# Altium PCB KEY_LED_Panel_v1.PcbDoc
Units mm, origin at the board's own origin, x right, y up, seen from the top; angles counter-clockwise.
Board outline 16 x 47 mm, 2 copper layers (L1 [TOP], L2 [BOT]), stack 1.57 mm thick; 15 components, 9 nets, 32 pads, 45 vias.
Unrouted connection lines stored in the file: 133.
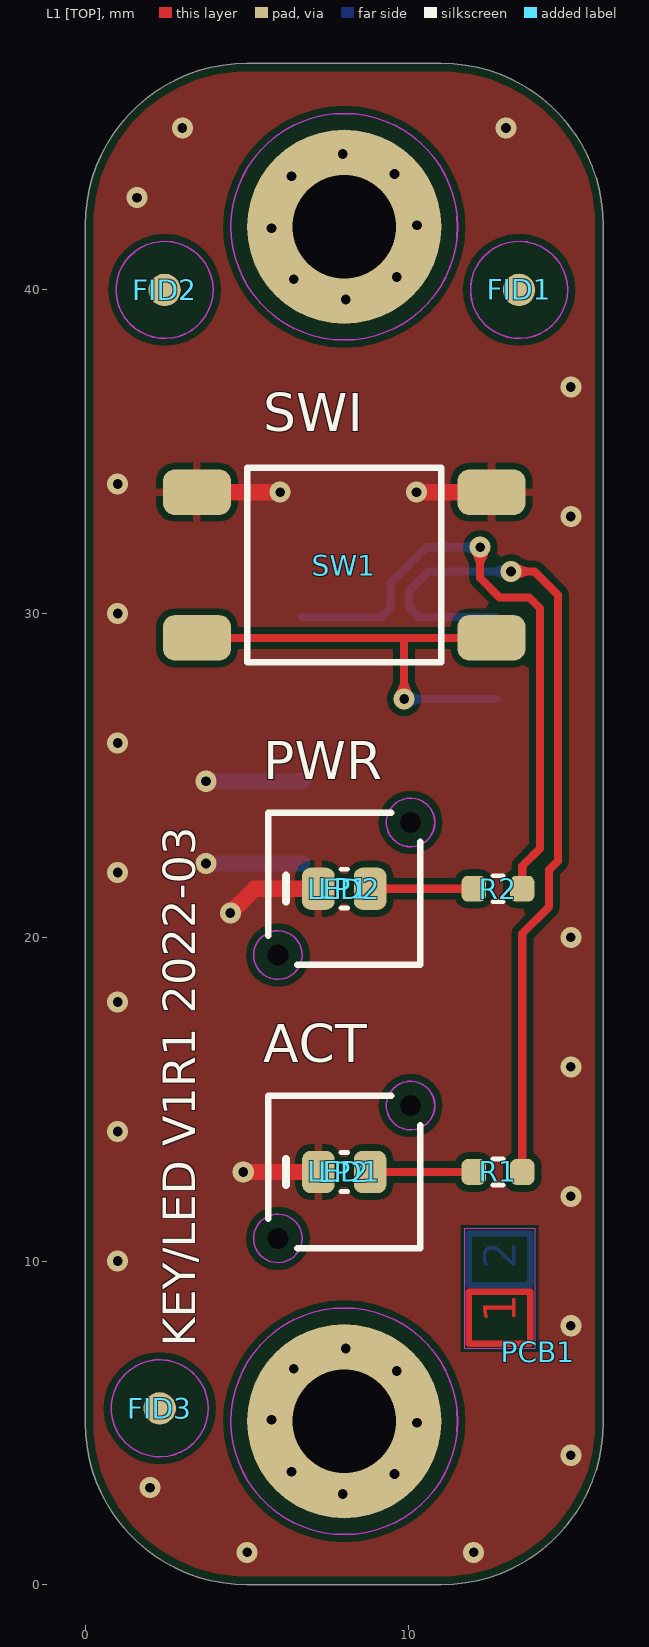
[diagram p0: L1 [TOP] view]
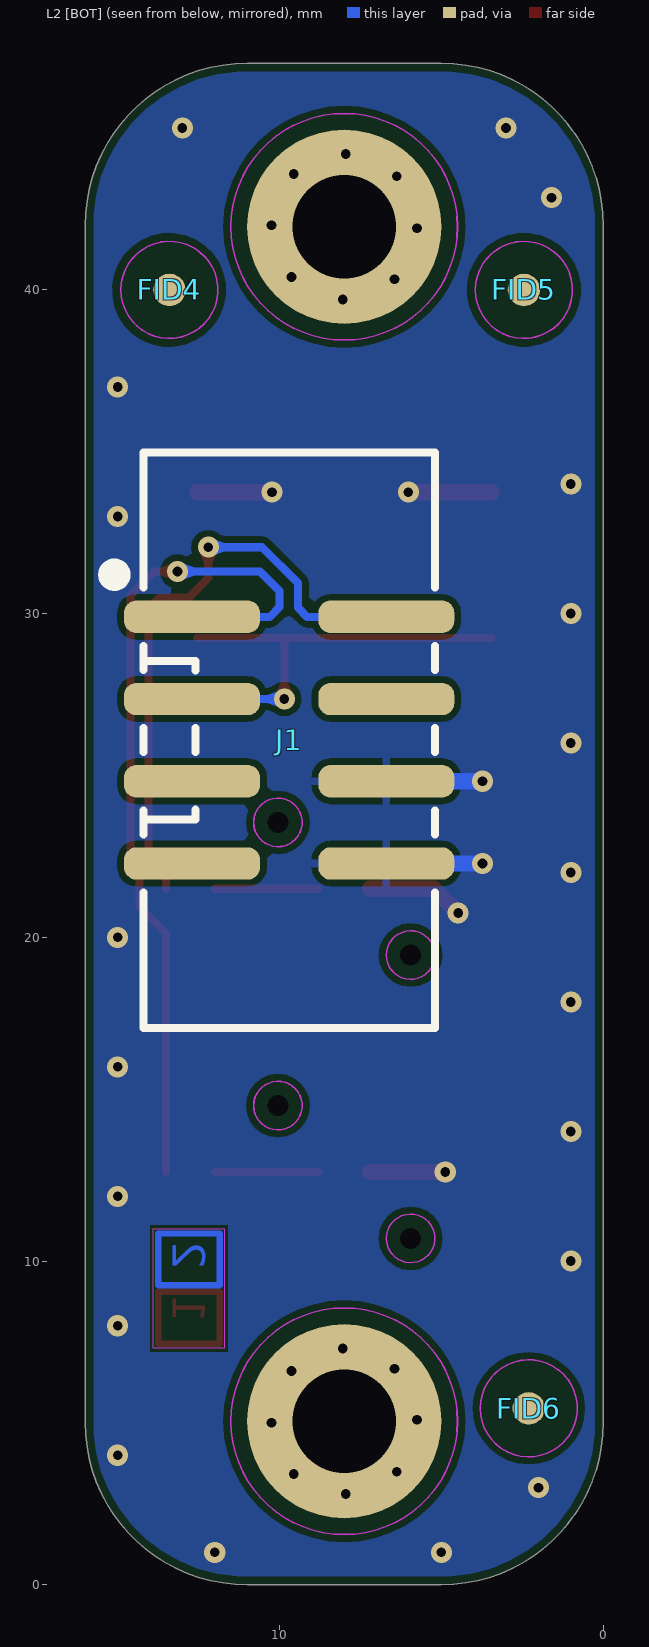
[diagram p1: L2 [BOT] view, seen from below]
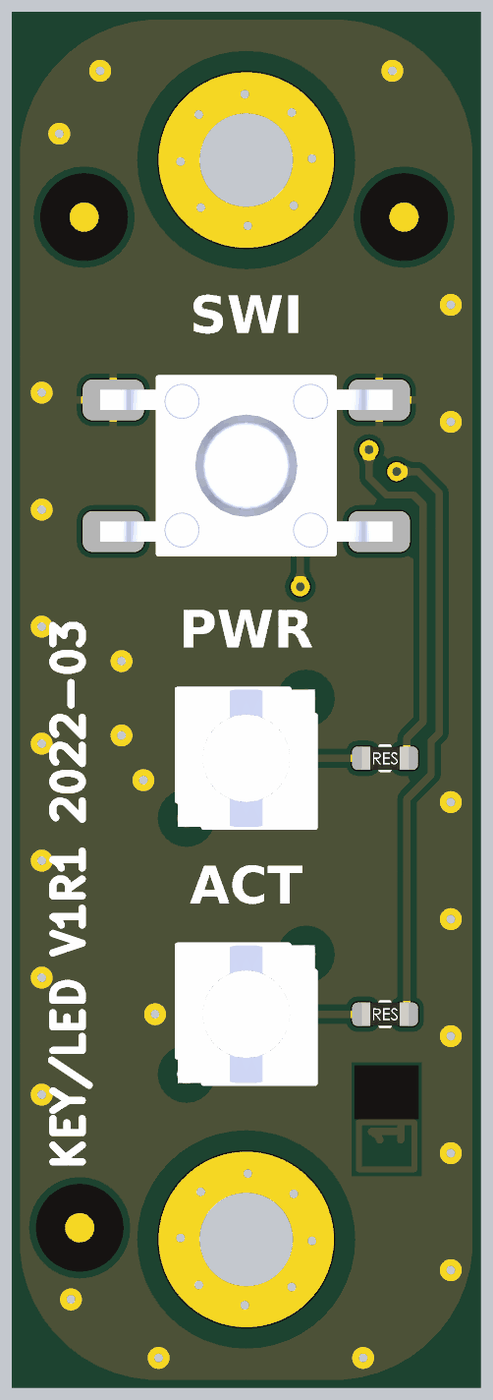
[diagram p2: 3D render of the assembled board from above, using the file's embedded part models]

## Layer stack, top to bottom
Solder [TOP]: solder mask 0.015, Solder Resist, Dk 3.5
L1 [TOP]: signal copper 0.035
prepreg #1: prepreg 0.1, PP-006, Dk 4.05
Core: dielectric 1.3, FR-4, Dk 4.05
prepreg #2: prepreg 0.1, PP-006, Dk 4.05
L2 [BOT]: signal copper 0.035
Solder [BOT]: solder mask 0.015, Solder Resist, Dk 3.5

## Board outline
0,5 ccw(c5,5) 5,0 11,0 ccw(c11,5) 16,5 16,42 ccw(c11,42) 11,47 5,47 ccw(c5,42) 0,42

## Design rules (kind name [scope] priority, off if disabled: settings)
BoardOutlineClearance BoardOutlineClearance_indicator [InComponent('PCB1')] p1: gap=0 ignorepadtopadclearanceinfootprint=FALSE
BoardOutlineClearance BoardOutlineClearance_Silk [IsText] p2: gap=0 ignorepadtopadclearanceinfootprint=FALSE
BoardOutlineClearance [All] p3: gap=0.25 ignorepadtopadclearanceinfootprint=FALSE
Clearance Clearance_marking [InComponent('PCB1')] p1: gap=0 ignorepadtopadclearanceinfootprint=FALSE
Clearance Clearance_polygon [InPolygon] p2: gap=0.2 ignorepadtopadclearanceinfootprint=FALSE
Clearance [All] p3: gap=0.2 ignorepadtopadclearanceinfootprint=FALSE
HoleSize [All] p1: absolutevalues=TRUE maxlimit=5 minlimit=0.2 maxpercent=80.000 minpercent=20.000
HoleToHoleClearance [All] p1: gap=0.4 allowstackedmicrovias=TRUE
MinimumAnnularRing [All] p1: minimumring=0.1
MinimumSolderMaskSliver [All] p1: minsoldermaskwidth=0.05
PlaneClearance [All] p1: clearance=0.5
PlaneConnect [All] p1: planeconnectstyle=Relief reliefexpansion=0.5 reliefentries=4 reliefconductorwidth=0.5 reliefairgap=0.3
PolygonConnect PolygonConnect_via [IsVia] p1: connectstyle=Direct reliefconductorwidth=0.254 reliefentries=4 polygonreliefangle="90 Angle" airgapwidth=0.254
PolygonConnect [All] p2: thpad.connectstyle=Relief thpad.reliefconductorwidth=0.5 thpad.reliefentries=4 thpad.polygonreliefangle="90 Angle" thpad.airgapwidth=0.3 smdpad.connectstyle=Relief smdpad.reliefconductorwidth=0.25 smdpad.reliefentries=4 smdpad.polygonreliefangle="90 Angle" smdpad.airgapwidth=0.2 via.connectstyle=Direct via.reliefconductorwidth=0.2 via.reliefentries=4 via.polygonreliefangle="90 Angle" via.airgapwidth=0.3
RoutingVias [All] p1: holewidth=0.3 width=0.65 viastyle="Through Hole" minholewidth=0.2 minwidth=0.45 maxholewidth=0.4 maxwidth=0.8
SilkToSilkClearance [All] p1: silktosilkclearance=0.15
SilkToSolderMaskClearance [IsPad] p1: minsilkscreentomaskgap=0.1 clearancetoexposedcopper=TRUE
SolderMaskExpansion SolderMaskExpansion_via [IsVia] p1: expansion=-10 istentingtop=FALSE
SolderMaskExpansion [All] p2: expansion=0.05 istentingtop=FALSE
Width [All] p1: maxlimit=4 minlimit=0.1 preferedwidth=0.2
23 further rules are at their usual default settings.

## Components (designator, comment, footprint, x,y, rotation, side; value= is the part's Value field where it differs from the comment)
FID1 "Fiducial" PCB_FID_RND_100x300 13.4,40 r0 top
FID2 "Fiducial" PCB_FID_RND_100x300 2.45,40 r0 top
FID3 "Fiducial" PCB_FID_RND_100x300 2.3,5.45 r0 top
FID4 "Fiducial" PCB_FID_RND_100x300 13.4,40 r90 bottom
FID5 "Fiducial" PCB_FID_RND_100x300 2.45,40 r90 bottom
FID6 "Fiducial" PCB_FID_RND_100x300 2.3,5.45 r90 bottom
J1 "8pin (2x4pin)" CON_IDC_SMD_P254_2X04 9.7,26.05 r270 bottom locked
LED1 "Green" LED_0805_GRN_R 8,12.75 r0 top
LED2 "Red" LED_0805_RED_R 8,21.5 r0 top
LP1 "VLP-400-F" LED_BVR_VLP-400-F 8,21.5 r0 top locked
LP2 "VLP-400-F" LED_BVR_VLP-400-F 8,12.75 r0 top locked
PCB1 "PCB_LAYER_STACKUP" PCB_STACKUP-2L_A1 14,7.2 r90 top
R1 "15k" RES_0603_R 12.75,12.75 r0 top
R2 "2k" RES_0603_R 12.75,21.5 r0 top
SW1 "TACT Switch" SWI_SHR_1301.9319 8,31.5 r180 top locked

## Footprints (in the part's own frame and the unit in brackets; to place one, negate y for a bottom-side part, rotate by r counter-clockwise, add the part's x,y. Pads: shape width x height; smd on the part's side, far side on the other; paste and mask are expansions set on the pad)
CON_IDC_SMD_P254_2X04 [mm]
  rrect75% 1x4.2 smd: 1(-3.85,-3) 2(-3.85,3) 3(-1.31,-3) 4(-1.31,3) 5(1.23,-3) 6(1.23,3) 7(3.77,-3) 8(3.77,3)
  silkscreen extent -8.93,-5.65 8.85,4.51, body extent -8.89,-4.75 8.89,4.75, height 10.2
LED_0805_GRN_R [mm]
  rrect50% 1x1.3 smd: 1(-0.8,0) 2(0.8,0)
  silkscreen extent -1.8,-0.6 0.1,0.6, body extent -1.01,-0.63 1.01,0.62, height 1.1
LED_0805_RED_R [mm]
  rrect50% 1x1.3 smd: 1(-0.8,0) 2(0.8,0)
  silkscreen extent -1.8,-0.6 0.1,0.6, body extent -1.01,-0.63 1.01,0.62, height 1.1
LED_BVR_VLP-400-F [mm]
  rrect50% 0x0 hole 0.65 unplated mask+0.1: MH(-2.05,-2.05)
  round 0 hole 0.65 unplated mask+0.1: MH(2.05,2.05)
  silkscreen extent -2.35,-2.35 2.35,2.35, body extent -2.35,-2.35 2.35,2.35, height 10.21
PCB_FID_RND_100x300 [mm]
  round 1 smd paste-10 mask+1: 0(0,0)
  L1 [TOP] pour cut-out: -1.6,0 -1.478,-0.612 -1.131,-1.131 -0.612,-1.478 0,-1.6 0,-1.6 0.612,-1.478 1.131,-1.131 1.478,-0.612 1.6,0 1.6,0 1.478,0.612 1.131,1.131 0.612,1.478 0,1.6 0,1.6 -0.612,1.478 -1.131,1.131 -1.478,0.612 -1.6,0
  L1 [TOP] keep-out circle w0.05: c0,0 r1.5
PCB_STACKUP-2L_A1 [mm]
  L1 [TOP] pour cut-out: 0,2.4 3.9,2.4 3.9,0 0,0
  L1 [TOP] lines w0.2: 0.25,2.15 0.25,0.25 1.85,0.25 1.85,2.15 0.25,2.15
  L2 [BOT] pour cut-out: 3.9,2.4 0,2.4 0,0 3.9,0
  L2 [BOT] lines w0.2: 2.05,2.15 2.05,0.25 3.65,0.25 3.65,2.15 2.05,2.15
  Keep-Out Layer region: 0.1,0.1 3.8,0.1 3.8,2.3 0.1,2.3
RES_0603_R [mm]
  rrect50% 0.75x0.8 smd: 1(-0.75,0) 2(0.75,0)
  silkscreen extent -0.15,-0.4 0.15,0.4, body extent -0.8,-0.4 0.8,0.4, height 0.3
SWI_SHR_1301.9319 [mm]
  rrect50% 2.1x1.4 smd: 1(-4.55,2.25) 2(4.55,2.25) 3(-4.55,-2.25) 4(4.55,-2.25)
  silkscreen extent -3,-3 3,3, body extent -5,-3 5,3, height 9.5

## Part data
FID1 FID2 FID3 FID4 FID5 FID6: library part PCB_FID_RND, "PCB Marking; Fiducial; Round;", Component Subtype=-, Component Type=Fiducial, Mounting Type=-, Supplier=?
J1: library part CON_2X04_ROW, "Connector; 2 Row;", Manufacturer=GENERIC, Package (Case)=THT, Component Subtype="Pin Header", Component Type=Connector, Mounting Type=THT, MPN=GENERIC, Supplier=?
LED1: library part DIO_LED_GRN, "Diode; LED; Green;", Manufacturer="Foshan NationStar Optoelectronics", MPN=NCD0805G1, Package (Case)="0805 (2012)", Component Subtype="LED Diode", Component Type=LED, Mounting Type=SMD, Supplier=LCSC
LED2: library part DIO_LED_RED, "Diode; LED; Red;", Manufacturer="Foshan NationStar Optoelectronics", MPN=NCD0805R1, Package (Case)="0805 (2012)", Component Subtype="LED Diode", Component Type=LED, Mounting Type=SMD, Supplier=LCSC
LP1 LP2: library part LED_BVR_VLP-xxx, "LED; Light pipe", Manufacturer=BIVAR, Component Type="Light pipe"
R1: library part RES-0043, "Resistor; Thick Film; 15k; 1%; 100mW; 100PPM; 75V; Standard; SMD; 0603 (1608);", Manufacturer="Yageo Corporation", MPN=TBD, Package (Case)="0603 (1608)", Component Subtype="Thick Film", Component Type=Resistor, Mounting Type=SMD, Supplier=?
R2: library part RES-0033, "Resistor; Thick Film; 2k2; 1%; 100mW; 100PPM; 75V; Standard; SMD; 0603 (1608);", Manufacturer="Yageo Corporation", MPN=TBD, Package (Case)="0603 (1608)", Component Subtype="Thick Film", Component Type=Resistor, Mounting Type=SMD, Supplier=?
SW1: library part SWI_TACT_4P_AABB, "Switch; Tactile; Monostable;", Manufacturer=SCHURTER, MPN=1301.9319
PCB1: Component Subtype=-, Component Type="PCB Marking", Mounting Type=-, Supplier=?

## Free pads (board coordinates)
  round 6 hole 3.2: MH(8,5.05) MH(8,41.95)

## Via types
v1: diameter 0.65, hole 0.3, L1 [TOP] to L2 [BOT], 45 vias

## Nets (pads, with @x,y where several pads share a name; then routed paths per layer and width w, separated by ;. In a path a pad name is that pad's centre, name@x,y a point inside that pad or via, vN(x,y) a via of type N, cw(c..) or ccw(c..) an arc to the next point about the centre after c; other vN are vias at no path point)
+3V3: J1.4
CM_I2C1_SCL: J1.7
CM_I2C1_SDA: J1.5
GND: J1.6 J1.8 LED1.1 LED2.1 SW1.3 SW1.4 | length 16.2
  L1 [TOP] w0.5: SW1.4 v1(6.02,33.75) ; v1(4.48,20.75) 5.23,21.5 LED2.1 ; v1(4.88,12.75) LED1.1 ; v1(10.23,33.75) SW1.3
  L2 [BOT] w0.5: v1(3.73,22.28) J1.8 ; v1(3.73,24.82) J1.6
  other v1: 5,1 12,1 2,3 15,4 15,8 1,10 15,12 1,14 15,16 1,18 15,20 1,22 1,26 1,30 15,33 1,34 15,37 1.6,42.85 3,45 13,45
LED_ACT_OUT: J1.1 R1.2 | length 26.8
  L1 [TOP] w0.25: v1(13.15,31.3) 13.876,31.3 14.6,30.576 14.6,22.358 14.326,22.084 14.326,20.94 13.5,20.114 R1.2
  L2 [BOT] w0.25: J1.1 10.3,29.9 10,30.2 10,30.7 10.6,31.3 v1(13.15,31.3)
LED_PWR_OUT: J1.2 R2.2 | length 18.9
  L1 [TOP] w0.25: v1(12.2,32.05) 12.2,31.098 12.798,30.5 13.714,30.5 14.05,30.164 14.05,22.747 13.5,22.197 R2.2
  L2 [BOT] w0.25: J1.2 9.146,29.9 9.433,30.188 9.433,30.948 10.535,32.05 v1(12.2,32.05)
NetLED1_2: LED1.2 R1.1 | length 3.2
  L1 [TOP] w0.25: LED1.2 R1.1
NetLED2_2: LED2.2 R2.1 | length 3.2
  L1 [TOP] w0.25: LED2.2 R2.1
USR_SWI: J1.3 SW1.1 SW1.2 | length 13.8
  L1 [TOP] w0.25: SW1.2 9.854,29.25 ; v1(9.85,27.36) 9.85,29.246 9.854,29.25 ; SW1.1 9.854,29.25
  L2 [BOT] w0.25: v1(9.85,27.36) J1.3
pads on no net: FID1.0 FID2.0 FID3.0 FID4.0 FID5.0 FID6.0 LP1.MH LP2.MH
copper on no net:
  other v1: 7.95,2.8 9.556,3.424 6.374,3.494 10.25,5 5.75,5.1 9.626,6.606 6.444,6.676 8.05,7.3 8.05,39.7 6.444,40.324 9.626,40.394 5.75,41.9 10.25,42 6.374,43.506 9.556,43.576 7.95,44.2

## Polygon pours and split planes (outlines as drawn)
GND on L2 [BOT] "L4_GND" (solid, remove dead copper, pour order 2): 0,47 16,47 16,0 0,0
GND on L1 [TOP] "L1_GND" (solid, remove dead copper, pour order 7): 0,47 16,47 16,0 0,0

## Keep-outs
Keep-Out Layer:
  circle w0.05: c5.95,10.7 r0.75
  circle w0.05: c10.05,14.8 r0.75
  circle w0.05: c5.95,19.45 r0.75
  circle w0.05: c10.05,23.55 r0.75
  circle w0.05: c8,41.95 r3.5
  circle w0.05: c8,5.05 r3.5

## Silkscreen, mask and mechanical layers (free items; w line width, h text height)
Silk [TOP]:
  text "SWI" at 5.5,35.25 h2
  text "PWR" at 5.5,24.5 h2
  text "ACT" at 5.5,15.75 h2
  text "KEY/LED V1R1 2022-03" at 3.4,7.35 h1 r90
M01 BoardOutline:
  the board outline again, w0.1
M10 Dimensions:
  lines w0.1: -1,0 0,0 ; 0,-1 0,0 ; 0,1 0,0 ; 1,0 0,0
M15 Reserved:
  circle w0.05: c113.462,30.788 r3.7
  circle w0.05: c113.462,30.788 r2.2
  circle w0.05: c75.44,30.776 r3.7
M19 AssemblySMDTop:
  text "SMD ASSEMBLY (TOP VIEW)" at -27.2,49.5 h5
M20 AssemblySMDBot:
  text "SMD ASSEMBLY (BOT VIEW)" at 52.2,49.4 h5

## Dimensions
0,42 to 16,5 on M10 Dimensions
11,0 to 11,47 on M10 Dimensions

## Text inside footprints (layer, text, board x,y; h text height)
PCB1: L2 [BOT] "2" at 13.3,9.75 h1 r90; L1 [TOP] "1" at 13.3,8.1 h1 r90